# EAGLE board Schematic_motor_driver-panelized (EAGLE 7.2.0)
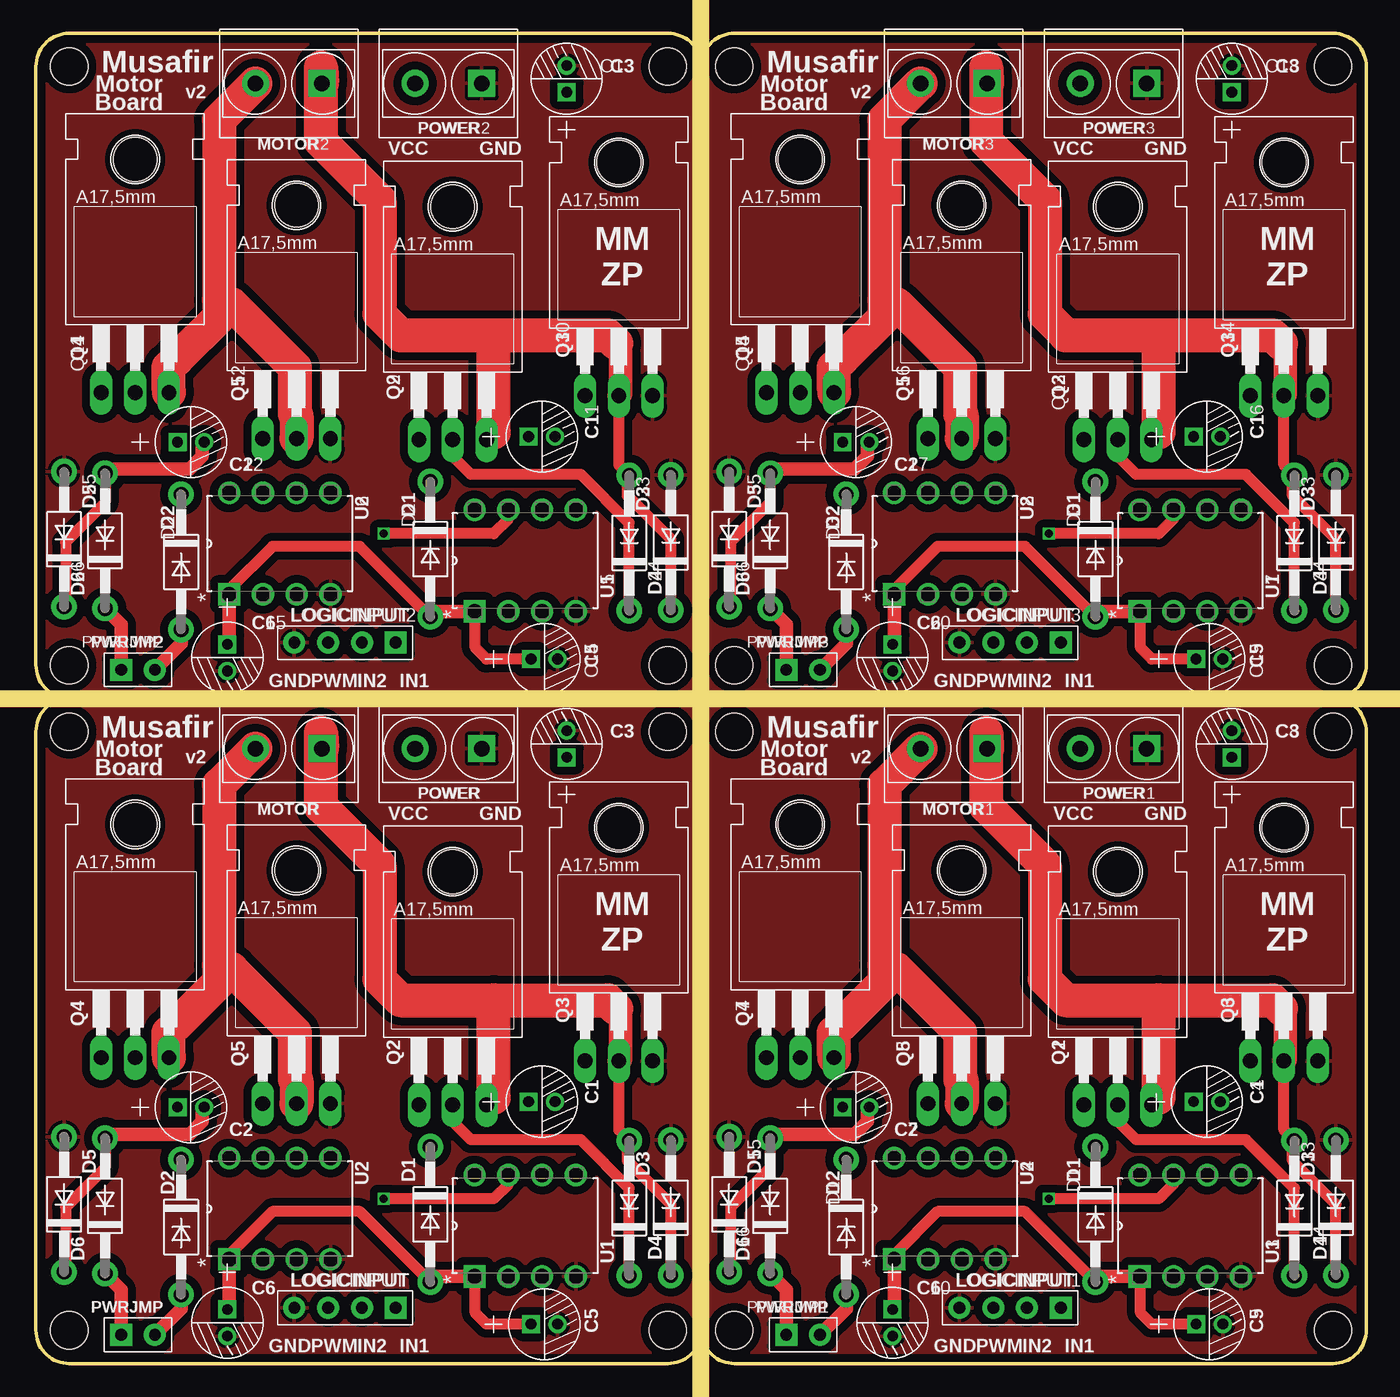
[diagram p0: board, top side]
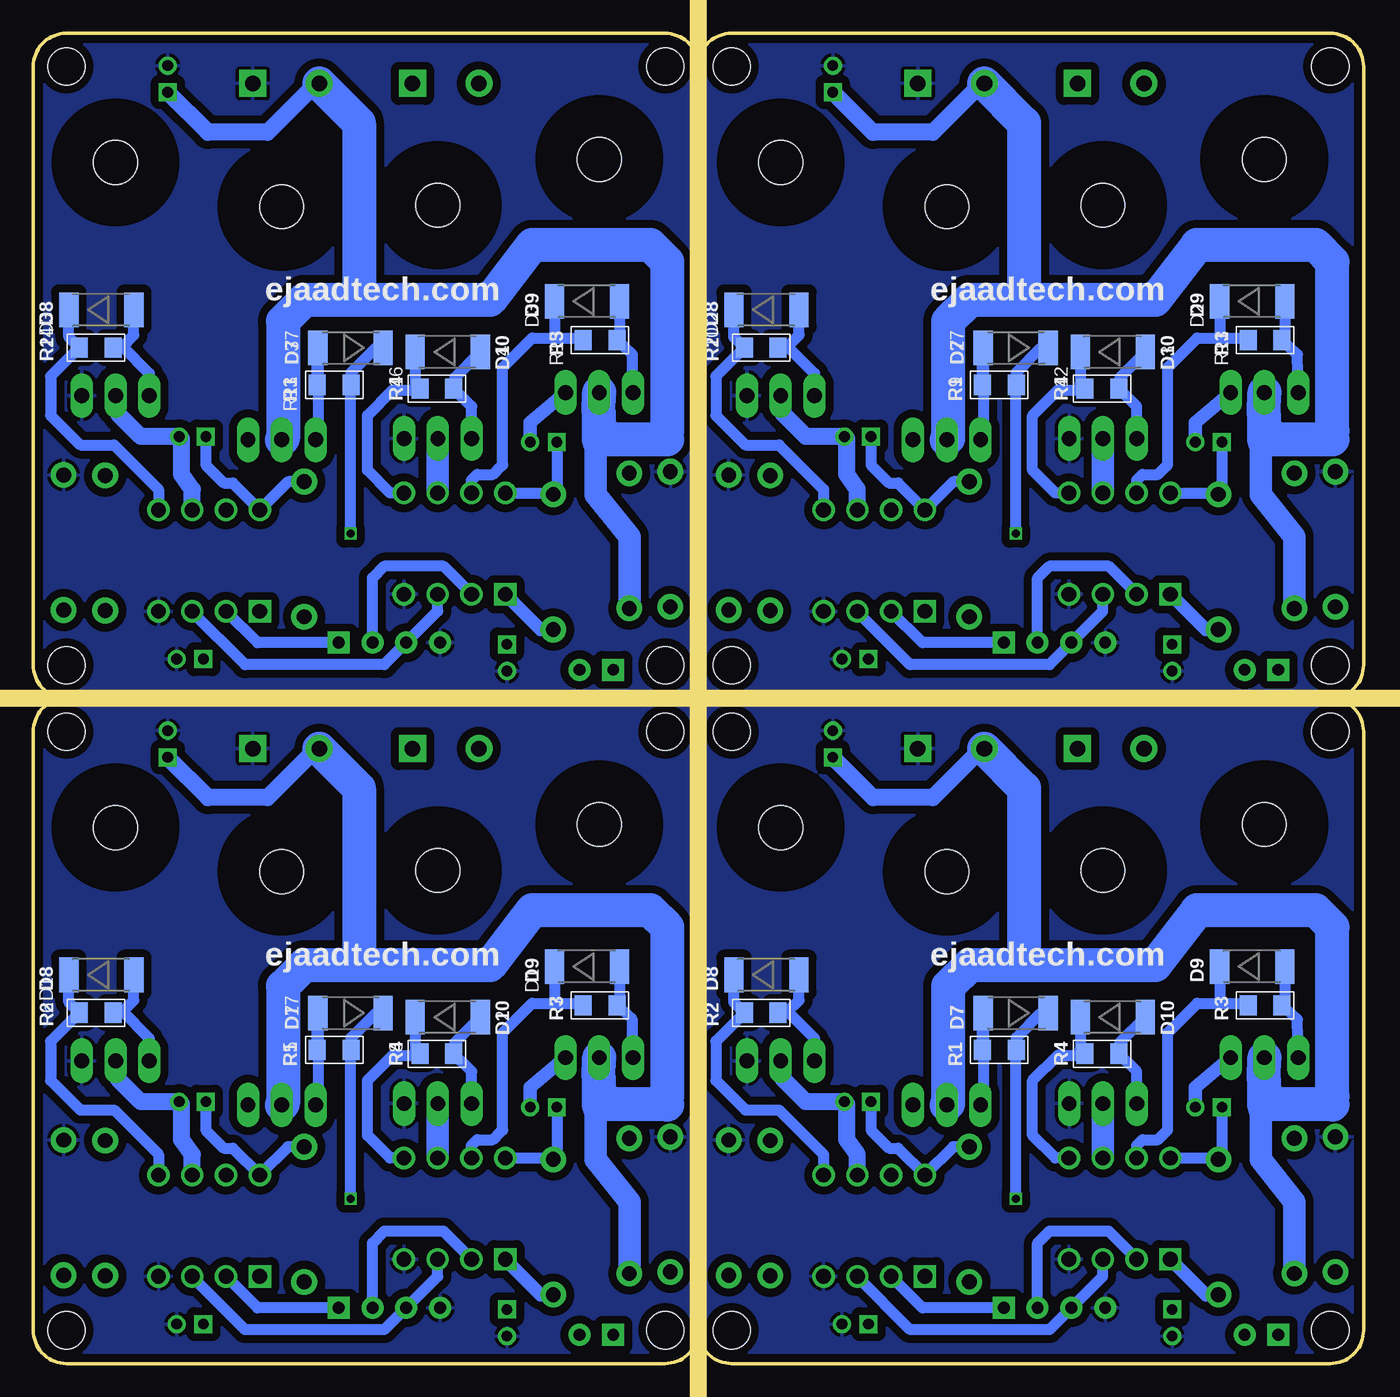
[diagram p1: board, bottom side, seen from below]

Size 100 x 100 mm. Coordinates in mm from the lower left corner, seen from the top.
Outline: 2.5,50 arc90 0,47.5 0,2.5 arc90 2.5,0 47.5,0 arc90 50,2.5 arc90 52.5,0 97.5,0 arc90 100,2.5 100,47.5 arc90 97.5,50 arc90 100,52.5 100,97.5 arc90 97.5,100 52.5,100 arc90 50,97.5 arc90 47.5,100 2.5,100 arc90 0,97.5 0,52.5 arc90 2.5,50
Copper layers (1*16): Top 0.035mm / dielectric 1.6mm / Bottom 0.035mm
Design rules "Elecrow_2-layer_PCB_eagle_rule": minimum track width 6mil, minimum drill 12mil, track to track 6mil, track to pad 6mil, pad to pad 6mil, via to via 8mil, smd to smd 0mil, copper to edge 20mil, drill to drill 10mil, minimum pad ring 6mil, minimum via ring 6mil, stop-mask expansion 0mil, vias tented up to drill 100mil, thermal gap 10mil
Holes 2.8 mm at 2.5,2.5 47.5,2.5 2.5,47.5 47.5,47.5 52.5,2.5 97.5,2.5 52.5,47.5 97.5,47.5 2.5,52.5 47.5,52.5 2.5,97.5 47.5,97.5 52.5,52.5 97.5,52.5 52.5,97.5 97.5,97.5
Milling: 2 lines

## Footprints (pad centres in the part's own frame; a part is rotated, then mirrored left to right if it is on the bottom)
PC-D5.3MM = drill 0.8 pad 1.35 square: + -1,0 | drill 0.8 pad 1.35: - 1,0
DO41-10 = drill 1.118 pad 1.93: A 5.08,0; C -5.08,0
MELF-MLL41 = smd 1.45 x 2.6: 1 -2.445,0; 2 2.445,0
H4-2.54 = drill 0.889 pad 1.651 square: 1 0,3.81 | drill 0.889 pad 1.651: 2 0,1.27; 3 0,-1.27; 4 0,-3.81
H2-5.0-10.5X8.0MM = drill 1.168 pad 2.032 square: 1 0,2.5 | drill 1.168 pad 2.032: 2 0,-2.5
H2-2.54 = drill 0.889 pad 1.651 square: 1 0,1.27 | drill 0.889 pad 1.651: 2 0,-1.27
TO220 = drill 1.118 long: 1 -2.54,-6.35; 2 0,-6.35; 3 2.54,-6.35 | hole 3.302: 0,11.176
R1206 = smd 1.27 x 1.524: 1 -1.27,0; 2 1.27,0
DIP254P762X533-8 = drill 1.118 square: 1 -7.62,7.62 | drill 1.118: 2 -7.62,5.08; 3 -7.62,2.54; 4 -7.62,0; 5 0,0; 6 0,2.54; 7 0,5.08; 8 0,7.62

## Placement (x,y rotation side)
C1  100uf  [PC-D5.3MM]  38.02,19.68 0 top
C2  100uf  [PC-D5.3MM]  11.64,19.26 0 top
C3  100uf  [PC-D5.3MM]  39.89,46.57 90 top
C4  100uf  [PC-D5.3MM]  88.03,19.68 0 top
C5  100uf  [PC-D5.3MM]  38.21,2.96 0 top
C6  100uf  [PC-D5.3MM]  14.39,3.06 270 top
C7  100uf  [PC-D5.3MM]  61.64,19.26 0 top
C8  100uf  [PC-D5.3MM]  89.89,46.57 90 top
C9  100uf  [PC-D5.3MM]  88.21,2.96 0 top
C10  100uf  [PC-D5.3MM]  64.39,3.06 270 top
C11  100uf  [PC-D5.3MM]  38.02,69.68 0 top
C12  100uf  [PC-D5.3MM]  11.64,69.26 0 top
C13  100uf  [PC-D5.3MM]  39.89,96.57 90 top
C14  100uf  [PC-D5.3MM]  38.21,52.96 0 top
C15  100uf  [PC-D5.3MM]  14.39,53.06 270 top
C16  100uf  [PC-D5.3MM]  88.03,69.68 0 top
C17  100uf  [PC-D5.3MM]  61.64,69.26 0 top
C18  100uf  [PC-D5.3MM]  89.89,96.57 90 top
C19  100uf  [PC-D5.3MM]  88.21,52.96 0 top
C20  100uf  [PC-D5.3MM]  64.39,53.06 270 top
D1  1N4004  [DO41-10]  29.64,11.21 270 top
D2  1N4004  [DO41-10]  10.91,10.26 270 top
D3  1N4004  [DO41-10]  44.6,11.68 90 top
D4  1N4004  [DO41-10]  47.72,11.72 90 top
D5  1N4004  [DO41-10]  5.19,11.85 90 top
D6  1N4004  [DO41-10]  2.11,11.96 90 top
D7  [MELF-MLL41]  26.15,26.35 180 bottom
D8  [MELF-MLL41]  44.88,29.21 0 bottom
D9  [MELF-MLL41]  8.37,29.84 0 bottom
D10  [MELF-MLL41]  18.84,26.04 0 bottom
D11  1N4004  [DO41-10]  79.64,11.21 270 top
D12  1N4004  [DO41-10]  60.91,10.26 270 top
D13  1N4004  [DO41-10]  94.6,11.68 90 top
D14  1N4004  [DO41-10]  97.72,11.72 90 top
D15  1N4004  [DO41-10]  55.19,11.85 90 top
D16  1N4004  [DO41-10]  52.11,11.96 90 top
D17  [MELF-MLL41]  76.15,26.35 180 bottom
D18  [MELF-MLL41]  94.88,29.21 0 bottom
D19  [MELF-MLL41]  58.37,29.84 0 bottom
D20  [MELF-MLL41]  68.84,26.04 0 bottom
D21  1N4004  [DO41-10]  29.64,61.21 270 top
D22  1N4004  [DO41-10]  10.91,60.26 270 top
D23  1N4004  [DO41-10]  44.6,61.68 90 top
D24  1N4004  [DO41-10]  47.72,61.72 90 top
D25  1N4004  [DO41-10]  5.19,61.85 90 top
D26  1N4004  [DO41-10]  2.11,61.97 90 top
D27  [MELF-MLL41]  26.15,76.35 180 bottom
D28  [MELF-MLL41]  44.88,79.21 0 bottom
D29  [MELF-MLL41]  8.37,79.84 0 bottom
D30  [MELF-MLL41]  18.84,76.03 0 bottom
D31  1N4004  [DO41-10]  79.64,61.21 270 top
D32  1N4004  [DO41-10]  60.91,60.26 270 top
D33  1N4004  [DO41-10]  94.6,61.68 90 top
D34  1N4004  [DO41-10]  97.72,61.72 90 top
D35  1N4004  [DO41-10]  55.19,61.85 90 top
D36  1N4004  [DO41-10]  52.11,61.97 90 top
D37  [MELF-MLL41]  76.15,76.35 180 bottom
D38  [MELF-MLL41]  94.88,79.21 0 bottom
D39  [MELF-MLL41]  58.37,79.84 0 bottom
D40  [MELF-MLL41]  68.84,76.03 0 bottom
LOGICINPUT  4p-2.54  [H4-2.54]  23.23,4.19 270 top
LOGICINPUT1  4p-2.54  [H4-2.54]  73.23,4.19 270 top
LOGICINPUT2  4p-2.54  [H4-2.54]  23.23,54.19 270 top
LOGICINPUT3  4p-2.54  [H4-2.54]  73.23,54.19 270 top
MOTOR  GREEN-2P-5.0  [H2-5.0-10.5X8.0MM]  19,46.23 270 top
MOTOR1  GREEN-2P-5.0  [H2-5.0-10.5X8.0MM]  69,46.23 270 top
MOTOR2  GREEN-2P-5.0  [H2-5.0-10.5X8.0MM]  19,96.23 270 top
MOTOR3  GREEN-2P-5.0  [H2-5.0-10.5X8.0MM]  69,96.23 270 top
POWER  GREEN-2P-5.0  [H2-5.0-10.5X8.0MM]  31,46.23 270 top
POWER1  GREEN-2P-5.0  [H2-5.0-10.5X8.0MM]  81,46.23 270 top
POWER2  GREEN-2P-5.0  [H2-5.0-10.5X8.0MM]  31,96.23 270 top
POWER3  GREEN-2P-5.0  [H2-5.0-10.5X8.0MM]  81,96.23 270 top
PWRJMP  2p-2.54  [H2-2.54]  7.67,2.15 90 top
PWRJMP1  2p-2.54  [H2-2.54]  57.67,2.15 90 top
PWRJMP2  2p-2.54  [H2-2.54]  7.67,52.15 90 top
PWRJMP3  2p-2.54  [H2-2.54]  57.67,52.15 90 top
Q1  IRF540  [TO220]  81.32,25.79 0 top
Q2  IRF540  [TO220]  31.32,25.79 0 top
Q3  IRF540  [TO220]  43.81,29.11 0 top
Q4  IRF540  [TO220]  7.45,29.35 0 top
Q5  IRF540  [TO220]  19.59,25.89 0 top
Q6  IRF540  [TO220]  93.81,29.11 0 top
Q7  IRF540  [TO220]  57.45,29.35 0 top
Q8  IRF540  [TO220]  69.59,25.89 0 top
Q9  IRF540  [TO220]  31.32,75.79 0 top
Q10  IRF540  [TO220]  43.81,79.11 0 top
Q11  IRF540  [TO220]  7.45,79.35 0 top
Q12  IRF540  [TO220]  19.59,75.89 0 top
Q13  IRF540  [TO220]  81.32,75.79 0 top
Q14  IRF540  [TO220]  93.81,79.11 0 top
Q15  IRF540  [TO220]  57.45,79.35 0 top
Q16  IRF540  [TO220]  69.59,75.89 0 top
R1  100R  [R1206]  27.38,23.57 180 bottom
R2  100R  [R1206]  45.27,26.37 0 bottom
R3  100R  [R1206]  7.4,26.93 0 bottom
R4  100R  [R1206]  19.66,23.29 0 bottom
R5  100R  [R1206]  77.38,23.57 180 bottom
R6  100R  [R1206]  95.27,26.37 0 bottom
R7  100R  [R1206]  57.4,26.93 0 bottom
R8  100R  [R1206]  69.66,23.29 0 bottom
R9  100R  [R1206]  27.38,73.57 180 bottom
R10  100R  [R1206]  45.27,76.37 0 bottom
R11  100R  [R1206]  7.4,76.92 0 bottom
R12  100R  [R1206]  19.66,73.29 0 bottom
R13  100R  [R1206]  77.38,73.57 180 bottom
R14  100R  [R1206]  95.27,76.37 0 bottom
R15  100R  [R1206]  57.4,76.92 0 bottom
R16  100R  [R1206]  69.66,73.29 0 bottom
U1  IR2104PBF  [DIP254P762X533-8]  40.59,14.17 90 top
U2  IR2104PBF  [DIP254P762X533-8]  22.14,15.45 90 top
U3  IR2104PBF  [DIP254P762X533-8]  90.59,14.17 90 top
U4  IR2104PBF  [DIP254P762X533-8]  72.14,15.45 90 top
U5  IR2104PBF  [DIP254P762X533-8]  40.59,64.17 90 top
U6  IR2104PBF  [DIP254P762X533-8]  22.14,65.45 90 top
U7  IR2104PBF  [DIP254P762X533-8]  90.59,64.17 90 top
U8  IR2104PBF  [DIP254P762X533-8]  72.14,65.45 90 top

## Library data of the parts
C1-C20 = Seeed-Capacitor-2016; MPN: KS 100uF/16V
D1-D6 D11-D16 D21-D26 D31-D36 = adafruit
D7-D10 D17-D20 D27-D30 D37-D40 = semicon-smd-ipc
LOGICINPUT LOGICINPUT1-LOGICINPUT3 = Seeed-Connector -2016; MPN: F185-1104A1BSYA1
MOTOR MOTOR1-MOTOR3 POWER POWER1-POWER3 = Seeed-Connector -2016
PWRJMP PWRJMP1-PWRJMP3 = Seeed-OPL-Connector; MPN: P125-1102A0BS116A1
Q1-Q16 = transistor-fet
R1-R16 = Seeed-Resistor-2016; MPN: RC1206JR-07100RL
U1-U8 = International_Rectifier_By_element14_Batch_1; MPN: IR2104PBF; OC_FARNELL: 8638748; OC_NEWARK: 63J7843; PACKAGE: PDIP; SUPPLIER: INTERNATIONAL RECTIFIER

## Nets
GATEPOWER: C5.+ C6.+ D1.A D2.A PWRJMP.2 U1.1 U2.1
GATEPOWER1: C9.+ C10.+ D11.A D12.A PWRJMP1.2 U3.1 U4.1
GATEPOWER2: C14.+ C15.+ D21.A D22.A PWRJMP2.2 U5.1 U6.1
GATEPOWER3: C19.+ C20.+ D31.A D32.A PWRJMP3.2 U7.1 U8.1
GND: C3.- C5.- C6.- C8.- C9.- C10.- C13.- C14.- C15.- C18.- C19.- C20.- D4.A D6.A D14.A D16.A D24.A D26.A D34.A D36.A LOGICINPUT1.4 LOGICINPUT2.4 LOGICINPUT3.4 LOGICINPUT.4 POWER1.1 POWER2.1 POWER3.1 POWER.1 Q3.3 Q5.3 Q6.3 Q8.3 Q10.3 Q12.3 Q14.3 Q16.3 U1.4 U2.4 U3.4 U4.4 U5.4 U6.4 U7.4 U8.4
IN1: LOGICINPUT.1 U1.2
IN2: LOGICINPUT.2 U2.2
IN3: LOGICINPUT1.1 U3.2
IN4: LOGICINPUT1.2 U4.2
IN5: LOGICINPUT2.1 U5.2
IN6: LOGICINPUT2.2 U6.2
IN7: LOGICINPUT3.1 U7.2
IN8: LOGICINPUT3.2 U8.2
N$1: D8.2 Q3.1 R2.2
N$2: C1.+ D1.C U1.8
N$3: D9.2 Q4.1 R3.2
N$4: C2.+ D2.C U2.8
N$5: D10.2 Q5.1 R4.2
N$6: D7.2 Q2.1 R1.2
N$7: D7.1 R1.1 U1.7
N$8: D8.1 R2.1 U1.5
N$9: D9.1 R3.1 U2.7
N$10: D10.1 R4.1 U2.5
N$11: C4.+ D11.C U3.8
N$12: C7.+ D12.C U4.8
N$13: D19.2 Q7.1 R7.2
N$14: D20.2 Q8.1 R8.2
N$15: D17.2 Q1.1 R5.2
N$16: D17.1 R5.1 U3.7
N$17: D18.1 R6.1 U3.5
N$18: D19.1 R7.1 U4.7
N$19: D20.1 R8.1 U4.5
N$20: D18.2 Q6.1 R6.2
N$21: C11.+ D21.C U5.8
N$22: C12.+ D22.C U6.8
N$23: D29.2 Q11.1 R11.2
N$24: D30.2 Q12.1 R12.2
N$25: D27.2 Q9.1 R9.2
N$26: D27.1 R9.1 U5.7
N$27: D28.1 R10.1 U5.5
N$28: D29.1 R11.1 U6.7
N$29: D30.1 R12.1 U6.5
N$30: D28.2 Q10.1 R10.2
N$31: C16.+ D31.C U7.8
N$32: C17.+ D32.C U8.8
N$33: D39.2 Q15.1 R15.2
N$34: D40.2 Q16.1 R16.2
N$35: D37.2 Q13.1 R13.2
N$36: D37.1 R13.1 U7.7
N$37: D38.1 R14.1 U7.5
N$38: D39.1 R15.1 U8.7
N$39: D40.1 R16.1 U8.5
N$40: D38.2 Q14.1 R14.2
POWER: C3.+ D3.C D5.C POWER.2 PWRJMP.1 Q2.2 Q4.2
POWER1: C8.+ D13.C D15.C POWER1.2 PWRJMP1.1 Q1.2 Q7.2
POWER2: C13.+ D23.C D25.C POWER2.2 PWRJMP2.1 Q9.2 Q11.2
POWER3: C18.+ D33.C D35.C POWER3.2 PWRJMP3.1 Q13.2 Q15.2
PWM: LOGICINPUT.3 U1.3 U2.3
PWM1: LOGICINPUT1.3 U3.3 U4.3
PWM2: LOGICINPUT2.3 U5.3 U6.3
PWM3: LOGICINPUT3.3 U7.3 U8.3
VS1: C1.- D3.A D4.C MOTOR.1 Q2.3 Q3.2 U1.6
VS2: C2.- D5.A D6.C MOTOR.2 Q4.3 Q5.2 U2.6
VS3: C4.- D13.A D14.C MOTOR1.1 Q1.3 Q6.2 U3.6
VS4: C7.- D15.A D16.C MOTOR1.2 Q7.3 Q8.2 U4.6
VS5: C11.- D23.A D24.C MOTOR2.1 Q9.3 Q10.2 U5.6
VS6: C12.- D25.A D26.C MOTOR2.2 Q11.3 Q12.2 U6.6
VS7: C16.- D33.A D34.C MOTOR3.1 Q13.3 Q14.2 U7.6
VS8: C17.- D35.A D36.C MOTOR3.2 Q15.3 Q16.2 U8.6

## Tracks (layer width: path | path; a pad name or v marks a point on that pad's centre or on a via)
GATEPOWER
  Top 0.813: D1.A 24.34,11.43 17.78,11.43 14.52,8.17 U2.1 | C5.+ 33.87,2.96 33.02,3.81 33.02,6.5 U1.1
  Top 1.016: U1.1 30.05,6.55 D1.A | PWRJMP.2 10.91,4.12 D2.A | C6.+ 14.52,4.19 U2.1
  Bottom 1.016: U2.1 11.87,5.18 D2.A
GATEPOWER1
  Top 0.813: D11.A 74.34,11.43 67.78,11.43 64.52,8.17 U4.1 | C9.+ 83.87,2.96 83.02,3.81 83.02,6.5 U3.1
  Top 1.016: U3.1 80.06,6.55 D11.A | PWRJMP1.2 60.91,4.12 D12.A | C10.+ 64.52,4.19 U4.1
  Bottom 1.016: U4.1 61.87,5.18 D12.A
GATEPOWER2
  Top 0.813: D21.A 24.34,61.43 17.78,61.43 14.52,58.17 U6.1 | C14.+ 33.87,52.96 33.02,53.81 33.02,56.49 U5.1
  Top 1.016: U5.1 30.05,56.55 D21.A | PWRJMP2.2 10.91,54.12 D22.A | C15.+ 14.52,54.19 U6.1
  Bottom 1.016: U6.1 11.87,55.18 D22.A
GATEPOWER3
  Top 0.813: D31.A 74.34,61.43 67.78,61.43 64.52,58.17 U8.1 | C19.+ 83.87,52.96 83.02,53.81 83.02,56.49 U7.1
  Top 1.016: U7.1 80.06,56.55 D31.A | PWRJMP3.2 60.91,54.12 D32.A | C20.+ 64.52,54.19 U8.1
  Bottom 1.016: U8.1 61.87,55.18 D32.A
GND
  pour Top (isolate 0.61): -12.7,106.96 112.15,105.96 111.15,-7.89 -12.7,-8.89
  pour Bottom (isolate 0.61): -7.89,109.42 -8.89,-11.43 104.96,-11.43 102.96,110.42
IN1
  Bottom 0.813: LOGICINPUT.1 33.15,4.19 U1.2
IN2
  Bottom 0.305: U2.2
  Bottom 0.813: U2.2 19.16,9.94 23.61,9.94 24.5,9.05 LOGICINPUT.2
IN3
  Bottom 0.813: LOGICINPUT1.1 83.15,4.19 U3.2
IN4
  Bottom 0.305: U4.2
  Bottom 0.813: U4.2 69.16,9.94 73.61,9.94 74.5,9.05 LOGICINPUT1.2
IN5
  Bottom 0.813: LOGICINPUT2.1 33.15,54.19 U5.2
IN6
  Bottom 0.305: U6.2
  Bottom 0.813: U6.2 19.16,59.94 23.61,59.94 24.5,59.05 LOGICINPUT2.2
IN7
  Bottom 0.813: LOGICINPUT3.1 83.15,54.19 U7.2
IN8
  Bottom 0.305: U8.2
  Bottom 0.813: U8.2 69.16,59.94 73.61,59.94 74.5,59.05 LOGICINPUT3.2
N$1
  Bottom 0.406: 43.29,26.45 43.98,26.45 R2.2
  Bottom 0.813: Q3.1 41.27,24.43 43.29,26.45 42.44,27.31 D8.2
N$2
  Bottom 0.813: D1.C 30.84,16.29 U1.8 34.99,16.19 35.67,16.19 37.02,17.55 C1.+
N$3
  Bottom 0.305: 5.92,27.23 R3.2
  Bottom 0.813: Q4.1 4.96,25.86 R3.2 | D9.2 5.92,27.23
N$4
  Bottom 0.406: 10.64,15.39 D2.C
  Bottom 0.813: U2.8 11.33,15.45 D2.C | C2.+ 10.64,15.39
N$5
  Bottom 0.305: 18.3,23.48 R4.2
  Bottom 0.813: Q5.1 17.05,21.95 R4.2 | 18.3,23.48 18.3,24.13 D10.2
N$6
  Bottom 0.813: Q2.1 28.59,19.63 D7.2 28.65,26.3 R1.2
N$7  (via drill 0.6)
  Top 0.813: U1.7 35.51,13.49 34.4,12.38 v26.15,12.38
  Bottom 0.406: 26.15,23.53 R1.1 26.11,24.49 | 24.24,26.35 D7.1
  Bottom 0.813: v26.15,12.38 26.15,23.53 | 26.11,24.49 24.24,26.35
N$8
  Bottom 0.813: U1.5 40.59,15.71 43.93,19.05 46.47,19.05 48.69,21.27 48.69,24.22 R2.1 47.33,27.15 D8.1
N$9
  Bottom 0.406: 8.73,27.09 R3.1 | 10.81,27.18 10.91,27.09 | 14.82,17.46 14.72,17.56
  Bottom 0.813: 14.72,17.56 14.72,24.86 12.49,27.09 10.91,27.09 8.73,27.09 | D9.1 10.81,27.18 | 17.06,15.22 U2.7 17.06,16.39 16.62,16.83 15.45,16.83 14.82,17.46
N$10
  Bottom 0.813: U2.5 23.18,15.45 24.88,17.14 24.88,21.27 22.97,23.18 21.05,23.18 R4.1 21.29,23.65 D10.1
N$11
  Bottom 0.813: D11.C 80.84,16.29 U3.8 84.99,16.19 85.67,16.19 87.03,17.55 C4.+
N$12
  Bottom 0.406: 60.64,15.39 D12.C
  Bottom 0.813: U4.8 61.33,15.45 D12.C | C7.+ 60.64,15.39
N$13
  Bottom 0.305: 55.92,27.23 R7.2
  Bottom 0.813: Q7.1 54.96,25.86 R7.2 | D19.2 55.92,27.23
N$14
  Bottom 0.305: 68.31,23.48 R8.2
  Bottom 0.813: Q8.1 67.05,21.95 R8.2 | 68.31,23.48 68.31,24.13 D20.2
N$15
  Bottom 0.813: Q1.1 78.59,19.63 D17.2 78.65,26.3 R5.2
N$16  (via drill 0.6)
  Top 0.813: U3.7 85.51,13.49 84.4,12.38 v76.15,12.38
  Bottom 0.406: 76.15,23.53 R5.1 76.11,24.49 | 74.24,26.35 D17.1
  Bottom 0.813: v76.15,12.38 76.15,23.53 | 76.11,24.49 74.24,26.35
N$17
  Bottom 0.813: U3.5 90.59,15.71 93.93,19.05 96.47,19.05 98.69,21.27 98.69,24.22 R6.1 97.33,27.15 D18.1
N$18
  Bottom 0.406: 58.73,27.09 R7.1 | 60.81,27.18 60.91,27.09 | 64.82,17.46 64.72,17.56
  Bottom 0.813: 64.72,17.56 64.72,24.86 62.49,27.09 60.91,27.09 58.73,27.09 | D19.1 60.81,27.18 | 67.06,15.22 U4.7 67.06,16.39 66.62,16.83 65.45,16.83 64.82,17.46
N$19
  Bottom 0.813: U4.5 73.18,15.45 74.88,17.14 74.88,21.27 72.97,23.18 71.05,23.18 R8.1 71.29,23.65 D20.1
N$20
  Bottom 0.406: 93.29,26.45 93.98,26.45 R6.2
  Bottom 0.813: Q6.1 91.27,24.43 93.29,26.45 92.44,27.31 D18.2
N$21
  Bottom 0.813: D21.C 30.84,66.29 U5.8 34.99,66.19 35.67,66.19 37.02,67.55 C11.+
N$22
  Bottom 0.406: 10.64,65.39 D22.C
  Bottom 0.813: U6.8 11.33,65.45 D22.C | C12.+ 10.64,65.39
N$23
  Bottom 0.305: 5.92,77.23 R11.2
  Bottom 0.813: Q11.1 4.96,75.86 R11.2 | D29.2 5.92,77.23
N$24
  Bottom 0.305: 18.3,73.48 R12.2
  Bottom 0.813: Q12.1 17.05,71.94 R12.2 | 18.3,73.48 18.3,74.13 D30.2
N$25
  Bottom 0.813: Q9.1 28.59,69.63 D27.2 28.65,76.3 R9.2
N$26  (via drill 0.6)
  Top 0.813: U5.7 35.51,63.49 34.4,62.38 v26.15,62.38
  Bottom 0.406: 26.15,73.53 R9.1 26.11,74.49 | 24.24,76.35 D27.1
  Bottom 0.813: v26.15,62.38 26.15,73.53 | 26.11,74.49 24.24,76.35
N$27
  Bottom 0.813: U5.5 40.59,65.71 43.93,69.05 46.47,69.05 48.69,71.27 48.69,74.22 R10.1 47.33,77.15 D28.1
N$28
  Bottom 0.406: 8.73,77.09 R11.1 | 10.81,77.18 10.91,77.09 | 14.82,67.46 14.72,67.56
  Bottom 0.813: 14.72,67.56 14.72,74.86 12.49,77.09 10.91,77.09 8.73,77.09 | D29.1 10.81,77.18 | 17.06,65.22 U6.7 17.06,66.39 16.62,66.83 15.45,66.83 14.82,67.46
N$29
  Bottom 0.813: U6.5 23.18,65.45 24.88,67.14 24.88,71.27 22.97,73.18 21.05,73.18 R12.1 21.29,73.65 D30.1
N$30
  Bottom 0.406: 43.29,76.45 43.98,76.45 R10.2
  Bottom 0.813: Q10.1 41.27,74.43 43.29,76.45 42.44,77.31 D28.2
N$31
  Bottom 0.813: D31.C 80.84,66.29 U7.8 84.99,66.19 85.67,66.19 87.03,67.55 C16.+
N$32
  Bottom 0.406: 60.64,65.39 D32.C
  Bottom 0.813: U8.8 61.33,65.45 D32.C | C17.+ 60.64,65.39
N$33
  Bottom 0.305: 55.92,77.23 R15.2
  Bottom 0.813: Q15.1 54.96,75.86 R15.2 | D39.2 55.92,77.23
N$34
  Bottom 0.305: 68.31,73.48 R16.2
  Bottom 0.813: Q16.1 67.05,71.94 R16.2 | 68.31,73.48 68.31,74.13 D40.2
N$35
  Bottom 0.813: Q13.1 78.59,69.63 D37.2 78.65,76.3 R13.2
N$36  (via drill 0.6)
  Top 0.813: U7.7 85.51,63.49 84.4,62.38 v76.15,62.38
  Bottom 0.406: 76.15,73.53 R13.1 76.11,74.49 | 74.24,76.35 D37.1
  Bottom 0.813: v76.15,62.38 76.15,73.53 | 76.11,74.49 74.24,76.35
N$37
  Bottom 0.813: U7.5 90.59,65.71 93.93,69.05 96.47,69.05 98.69,71.27 98.69,74.22 R14.1 97.33,77.15 D38.1
N$38
  Bottom 0.406: 58.73,77.09 R15.1 | 60.81,77.18 60.91,77.09 | 64.82,67.46 64.72,67.56
  Bottom 0.813: 64.72,67.56 64.72,74.86 62.49,77.09 60.91,77.09 58.73,77.09 | D39.1 60.81,77.18 | 67.06,65.22 U8.7 67.06,66.39 66.62,66.83 65.45,66.83 64.82,67.46
N$39
  Bottom 0.813: U8.5 73.18,65.45 74.88,67.14 74.88,71.27 72.97,73.18 71.05,73.18 R16.1 71.29,73.65 D40.1
N$40
  Bottom 0.406: 93.29,76.45 93.98,76.45 R14.2
  Bottom 0.813: Q14.1 91.27,74.43 93.29,76.45 92.44,77.31 D38.2
POWER
  Top 0.813: D3.C 44.6,13.19 40.96,16.83 32.7,16.83 31.43,18.1 31.43,19.33 Q2.2
  Top 1.016: D5.C 6.4,5.56 PWRJMP.1
  Bottom 1.27: POWER.2 28.7,46.23 32.38,42.55 36.87,42.55 C3.+
  Bottom 1.676: 7.73,19.15 7.73,15.34 5.19,12.16 D5.C
  Bottom 1.778: 2.33,20.1 2.33,19.47 | 7.5,19.47 7.5,19.9
  Bottom 1.93: 7.5,19.9 6.78,20.1 7.73,19.15
  Bottom 2.54: 7.5,19.9 7.5,21.46 Q4.2 | 2.33,20.1 2.33,32.8 3.6,34.07 12.49,34.07 15.67,29.95 25.51,29.95 | 25.51,29.95 29.64,29.95 31.23,28.36 31.23,19.54 Q2.2 | 2.33,19.47 7.5,19.47 | 25.51,29.95 25.51,43.24 POWER.2
POWER1
  Top 0.813: D13.C 94.6,13.19 90.96,16.83 82.7,16.83 81.43,18.1 81.43,19.33 Q1.2
  Top 1.016: D15.C 56.4,5.56 PWRJMP1.1
  Bottom 1.27: POWER1.2 78.7,46.23 82.39,42.55 86.86,42.55 C8.+
  Bottom 1.676: 57.73,19.15 57.73,15.34 55.19,12.16 D15.C
  Bottom 1.778: 52.34,20.1 52.34,19.47 | 57.49,19.47 57.49,19.9
  Bottom 1.93: 57.49,19.9 56.78,20.1 57.73,19.15
  Bottom 2.54: 57.49,19.9 57.5,21.46 Q7.2 | 52.34,20.1 52.34,32.8 53.6,34.07 62.49,34.07 65.67,29.95 75.51,29.95 | 75.51,29.95 79.64,29.95 81.23,28.36 81.23,19.54 Q1.2 | 52.34,19.47 57.49,19.47 | 75.51,29.95 75.51,43.24 POWER1.2
POWER2
  Top 0.813: D23.C 44.6,63.19 40.96,66.83 32.7,66.83 31.43,68.1 31.43,69.33 Q9.2
  Top 1.016: D25.C 6.4,55.56 PWRJMP2.1
  Bottom 1.27: POWER2.2 28.7,96.23 32.38,92.55 36.87,92.55 C13.+
  Bottom 1.676: 7.73,69.15 7.73,65.34 5.19,62.16 D25.C
  Bottom 1.778: 2.33,70.1 2.33,69.47 | 7.5,69.47 7.5,69.9
  Bottom 1.93: 7.5,69.9 6.78,70.1 7.73,69.15
  Bottom 2.54: 7.5,69.9 7.5,71.46 Q11.2 | 2.33,70.1 2.33,82.8 3.6,84.07 12.49,84.07 15.67,79.94 25.51,79.94 | 25.51,79.94 29.64,79.94 31.23,78.36 31.23,69.54 Q9.2 | 2.33,69.47 7.5,69.47 | 25.51,79.94 25.51,93.24 POWER2.2
POWER3
  Top 0.813: D33.C 94.6,63.19 90.96,66.83 82.7,66.83 81.43,68.1 81.43,69.33 Q13.2
  Top 1.016: D35.C 56.4,55.56 PWRJMP3.1
  Bottom 1.27: POWER3.2 78.7,96.23 82.39,92.55 86.86,92.55 C18.+
  Bottom 1.676: 57.73,69.15 57.73,65.34 55.19,62.16 D35.C
  Bottom 1.778: 52.34,70.1 52.34,69.47 | 57.49,69.47 57.49,69.9
  Bottom 1.93: 57.49,69.9 56.78,70.1 57.73,69.15
  Bottom 2.54: 57.49,69.9 57.5,71.46 Q15.2 | 52.34,70.1 52.34,82.8 53.6,84.07 62.49,84.07 65.67,79.94 75.51,79.94 | 75.51,79.94 79.64,79.94 81.23,78.36 81.23,69.54 Q13.2 | 52.34,69.47 57.49,69.47 | 75.51,79.94 75.51,93.24 POWER3.2
PWM
  Bottom 0.813: U2.3 19.6,6.55 LOGICINPUT.3 23.61,2.54 34.09,2.54 38.05,6.5 U1.3
PWM1
  Bottom 0.813: U4.3 69.6,6.55 LOGICINPUT1.3 73.61,2.54 84.08,2.54 88.05,6.5 U3.3
PWM2
  Bottom 0.813: U6.3 19.6,56.55 LOGICINPUT2.3 23.61,52.54 34.09,52.54 38.05,56.5 U5.3
PWM3
  Bottom 0.813: U8.3 69.6,56.55 LOGICINPUT3.3 73.61,52.54 84.08,52.54 88.05,56.5 U7.3
VS1
  Top 0.813: 44.69,16.86 D3.A | D4.C 47.72,11.97 44.45,15.24 44.45,16.61 D3.A | D3.A 43.81,17.55 Q3.2
  Top 1.676: Q2.3 33.86,19.46 34.4,20
  Top 1.778: 43.61,26.67 43.61,26.35 43.93,26.04 43.93,22.88 Q3.2
  Top 2.54: 34.4,27.3 27.42,27.3 25.83,28.89 25.83,37.47 21.43,41.86 21.43,47.44 MOTOR.1 | 34.4,27.3 42.98,27.3 43.61,26.67 | 34.4,20 34.4,27.3
  Bottom 1.27: Q3.2 43.61,22.56 43.61,21.37 41.92,19.68 C1.- 38.85,19.5 38.85,16.83 38.05,15.71 U1.6
VS2
  Top 0.813: D5.A 5.19,14.72 2.22,11.75 2.22,7 D6.C
  Top 1.016: C2.- 12.49,19.11 12.49,18.2 11.54,17.25 5.51,17.25 arc90 D5.A
  Top 1.93: 10.59,25.5 9.96,24.86 | 19.59,21.27 19.48,21.37
  Top 2.54: 13.77,29.95 13.77,43.49 MOTOR.2 | 13.77,29.95 13.77,28.68 10.59,25.5 | 19.48,21.37 19.48,24.86 14.72,29.63 14.08,29.63 13.77,29.95 | 9.96,24.86 9.96,23.43 Q4.3 | 19.59,21.27 Q5.2
  Bottom 0.305: 19.59,15.46 U2.6
  Bottom 1.016: C2.- 12.64,20.75 Q4.3
  Bottom 1.676: Q5.2 19.59,15.46
VS3
  Top 0.813: 94.69,16.86 D13.A | D14.C 97.72,11.97 94.45,15.24 94.45,16.61 D13.A | D13.A 93.81,17.55 Q6.2
  Top 1.676: Q1.3 83.86,19.46 84.4,20
  Top 1.778: 93.61,26.67 93.61,26.35 93.93,26.04 93.93,22.88 Q6.2
  Top 2.54: 84.4,27.3 77.42,27.3 75.83,28.89 75.83,37.47 71.44,41.86 71.44,47.44 MOTOR1.1 | 84.4,27.3 92.97,27.3 93.61,26.67 | 84.4,20 84.4,27.3
  Bottom 1.27: Q6.2 93.61,22.56 93.61,21.37 91.92,19.68 C4.- 88.85,19.5 88.85,16.83 88.05,15.71 U3.6
VS4
  Top 0.813: D15.A 55.19,14.72 52.22,11.75 52.22,7 D16.C
  Top 1.016: C7.- 62.49,19.11 62.49,18.2 61.54,17.25 55.51,17.25 arc90 D15.A
  Top 1.93: 60.59,25.5 59.95,24.86 | 69.59,21.27 69.48,21.37
  Top 2.54: 63.77,29.95 63.77,43.49 MOTOR1.2 | 63.77,29.95 63.77,28.68 60.59,25.5 | 69.48,21.37 69.48,24.86 64.72,29.63 64.08,29.63 63.77,29.95 | 59.95,24.86 59.95,23.43 Q7.3 | 69.59,21.27 Q8.2
  Bottom 0.305: 69.59,15.46 U4.6
  Bottom 1.016: C7.- 62.64,20.75 Q7.3
  Bottom 1.676: Q8.2 69.59,15.46
VS5
  Top 0.813: 44.69,66.86 D23.A | D24.C 47.72,61.97 44.45,65.24 44.45,66.61 D23.A | D23.A 43.81,67.55 Q10.2
  Top 1.676: Q9.3 33.86,69.46 34.4,70
  Top 1.778: 43.61,76.67 43.61,76.35 43.93,76.03 43.93,72.88 Q10.2
  Top 2.54: 34.4,77.31 27.42,77.31 25.83,78.89 25.83,87.47 21.43,91.86 21.43,97.44 MOTOR2.1 | 34.4,77.31 42.98,77.31 43.61,76.67 | 34.4,70 34.4,77.31
  Bottom 1.27: Q10.2 43.61,72.56 43.61,71.37 41.92,69.68 C11.- 38.85,69.5 38.85,66.83 38.05,65.71 U5.6
VS6
  Top 0.813: D25.A 5.19,64.72 2.22,61.75 2.22,57 D26.C
  Top 1.016: C12.- 12.49,69.11 12.49,68.2 11.54,67.25 5.51,67.25 arc90 D25.A
  Top 1.93: 10.59,75.5 9.96,74.86 | 19.59,71.27 19.48,71.37
  Top 2.54: 13.77,79.94 13.77,93.5 MOTOR2.2 | 13.77,79.94 13.77,78.67 10.59,75.5 | 19.48,71.37 19.48,74.86 14.72,79.63 14.08,79.63 13.77,79.94 | 9.96,74.86 9.96,73.44 Q11.3 | 19.59,71.27 Q12.2
  Bottom 0.305: 19.59,65.46 U6.6
  Bottom 1.016: C12.- 12.64,70.75 Q11.3
  Bottom 1.676: Q12.2 19.59,65.46
VS7
  Top 0.813: 94.69,66.86 D33.A | D34.C 97.72,61.97 94.45,65.24 94.45,66.61 D33.A | D33.A 93.81,67.55 Q14.2
  Top 1.676: Q13.3 83.86,69.46 84.4,70
  Top 1.778: 93.61,76.67 93.61,76.35 93.93,76.03 93.93,72.88 Q14.2
  Top 2.54: 84.4,77.31 77.42,77.31 75.83,78.89 75.83,87.47 71.44,91.86 71.44,97.44 MOTOR3.1 | 84.4,77.31 92.97,77.31 93.61,76.67 | 84.4,70 84.4,77.31
  Bottom 1.27: Q14.2 93.61,72.56 93.61,71.37 91.92,69.68 C16.- 88.85,69.5 88.85,66.83 88.05,65.71 U7.6
VS8
  Top 0.813: D35.A 55.19,64.72 52.22,61.75 52.22,57 D36.C
  Top 1.016: C17.- 62.49,69.11 62.49,68.2 61.54,67.25 55.51,67.25 arc90 D35.A
  Top 1.93: 60.59,75.5 59.95,74.86 | 69.59,71.27 69.48,71.37
  Top 2.54: 63.77,79.94 63.77,93.5 MOTOR3.2 | 63.77,79.94 63.77,78.67 60.59,75.5 | 69.48,71.37 69.48,74.86 64.72,79.63 64.08,79.63 63.77,79.94 | 59.95,74.86 59.95,73.44 Q15.3 | 69.59,71.27 Q16.2
  Bottom 0.305: 69.59,65.46 U8.6
  Bottom 1.016: C17.- 62.64,70.75 Q15.3
  Bottom 1.676: Q16.2 69.59,65.46

## Text on the board
Milling: V-CUT LINE | V-CUT LINE
_tNames: Musafir | C3 | Musafir | C3 | Motor / Board | v2 | Motor / Board | v2 | POWER | POWER | MOTOR | VCC | GND | MOTOR | VCC | GND | MM / ZP | MM / ZP | Q4 | Q4 | Q3 | Q3 | Q2 | Q2 | Q5 | Q5 | C1 | C1 | C2 | C2 | D2 | D1 | D2 | D1 | D5 | D3 | D5 | D3 | U2 | U2 | D6 | U1 | D4 | D6 | U1 | D4 | LOGICINPUT | LOGICINPUT | PWRJMP | C6 | PWRJMP | C6 | C5 | C5 | GND | PWM | IN2 | IN1 | GND | PWM | IN2 | IN1 | Musafir | C3 | Musafir | C3 | Motor / Board | v2 | Motor / Board | v2 | POWER | POWER | MOTOR | VCC | GND | MOTOR | VCC | GND | MM / ZP | MM / ZP | Q4 | Q4 | Q3 | Q3 | Q2 | Q2 | Q5 | Q5 | C1 | C1 | C2 | C2 | D2 | D1 | D2 | D1 | D5 | D3 | D5 | D3 | U2 | U2 | D6 | U1 | D4 | D6 | U1 | D4 | LOGICINPUT | LOGICINPUT | PWRJMP | C6 | PWRJMP | C6 | C5 | C5 | GND | PWM | IN2 | IN1 | GND | PWM | IN2 | IN1
_bNames: ejaadtech.com | ejaadtech.com | D9 | D8 | D9 | D8 | R3 | R3 | D10 | D10 | D7 | R2 | D7 | R2 | R1 | R1 | R4 | R4 | ejaadtech.com | ejaadtech.com | D9 | D8 | D9 | D8 | R3 | R3 | D10 | D10 | D7 | R2 | D7 | R2 | R1 | R1 | R4 | R4